# Altium PCB PCB_EN1093.PcbDoc
Units mm, origin at the board's own origin, x right, y up, seen from the top; angles counter-clockwise.
Board outline 71.18 x 60.2 mm, 2 copper layers (Top Layer, Bottom Layer); 26 components, 25 nets, 107 pads, 3 vias.
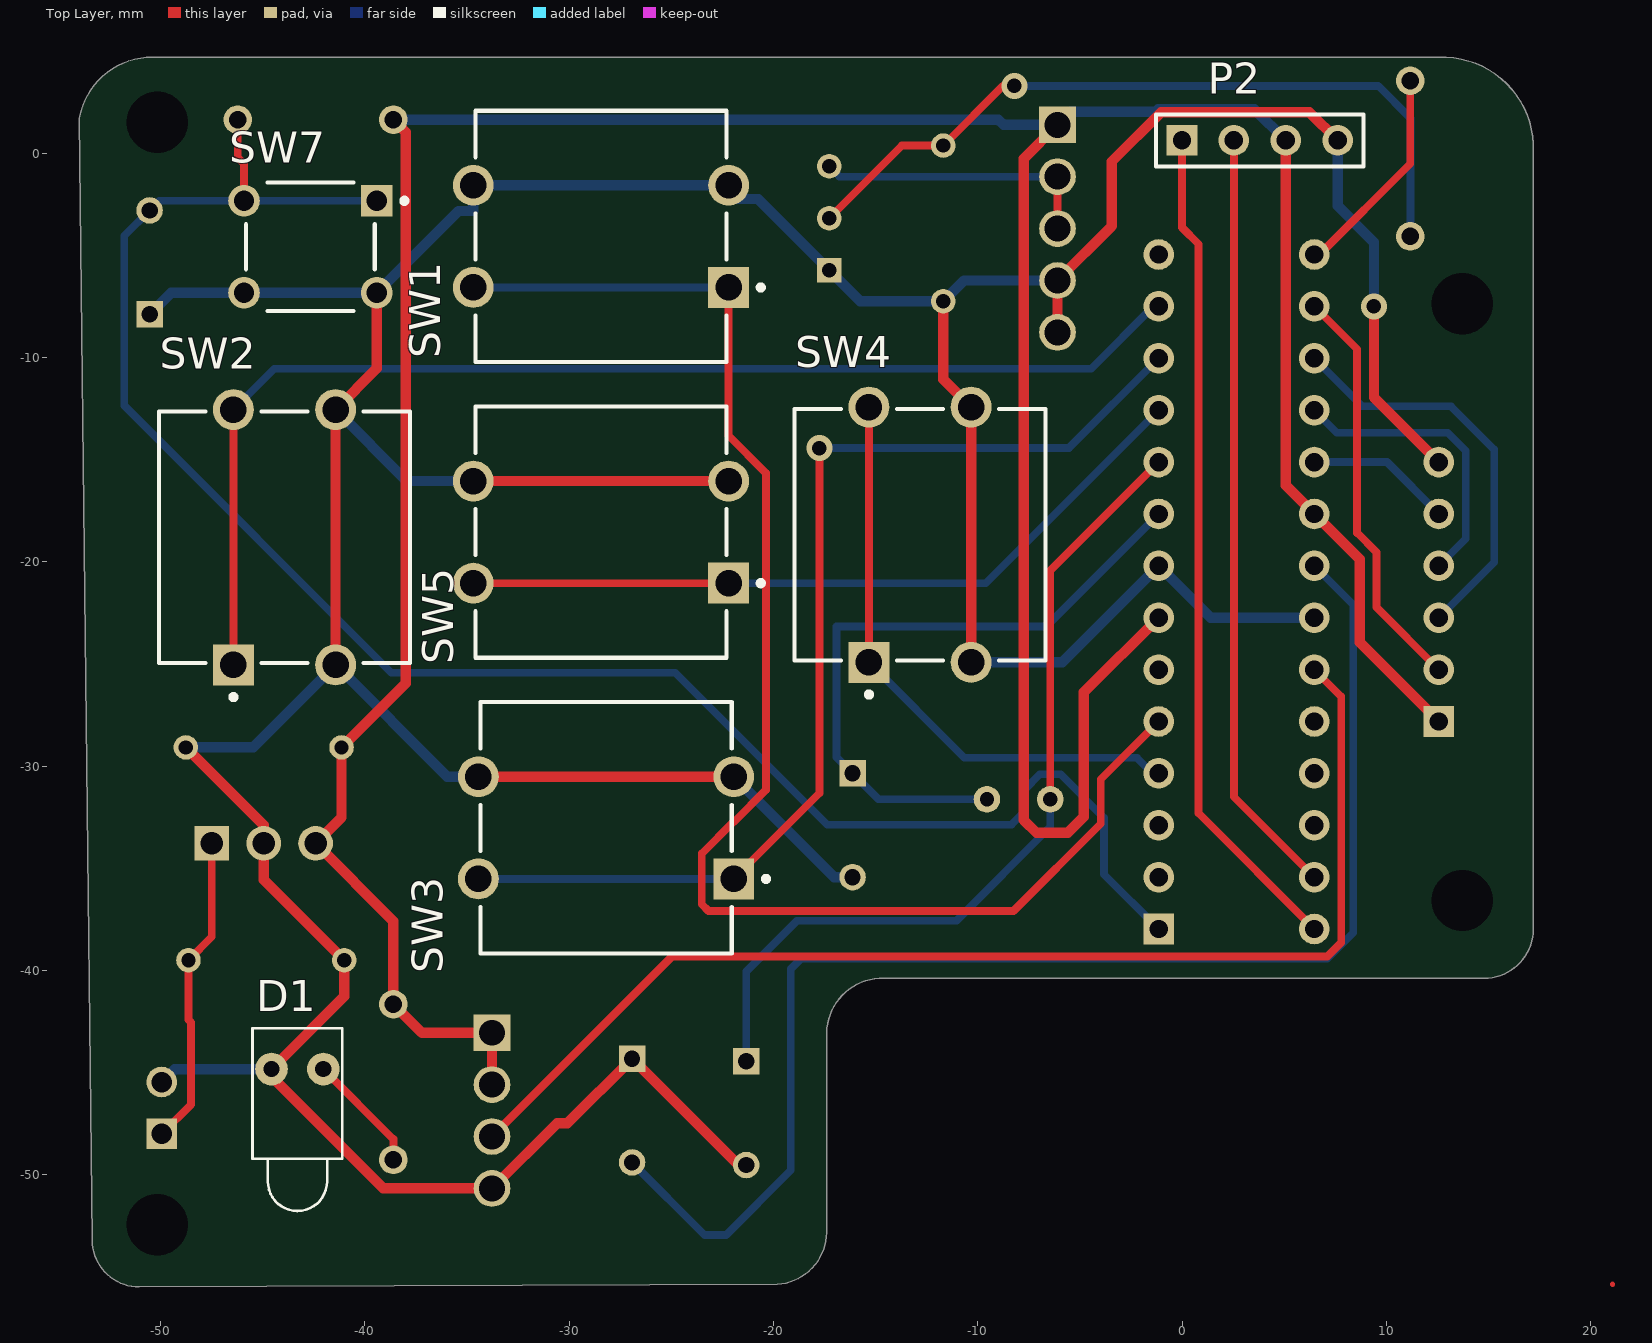
[diagram p0: Top Layer view]
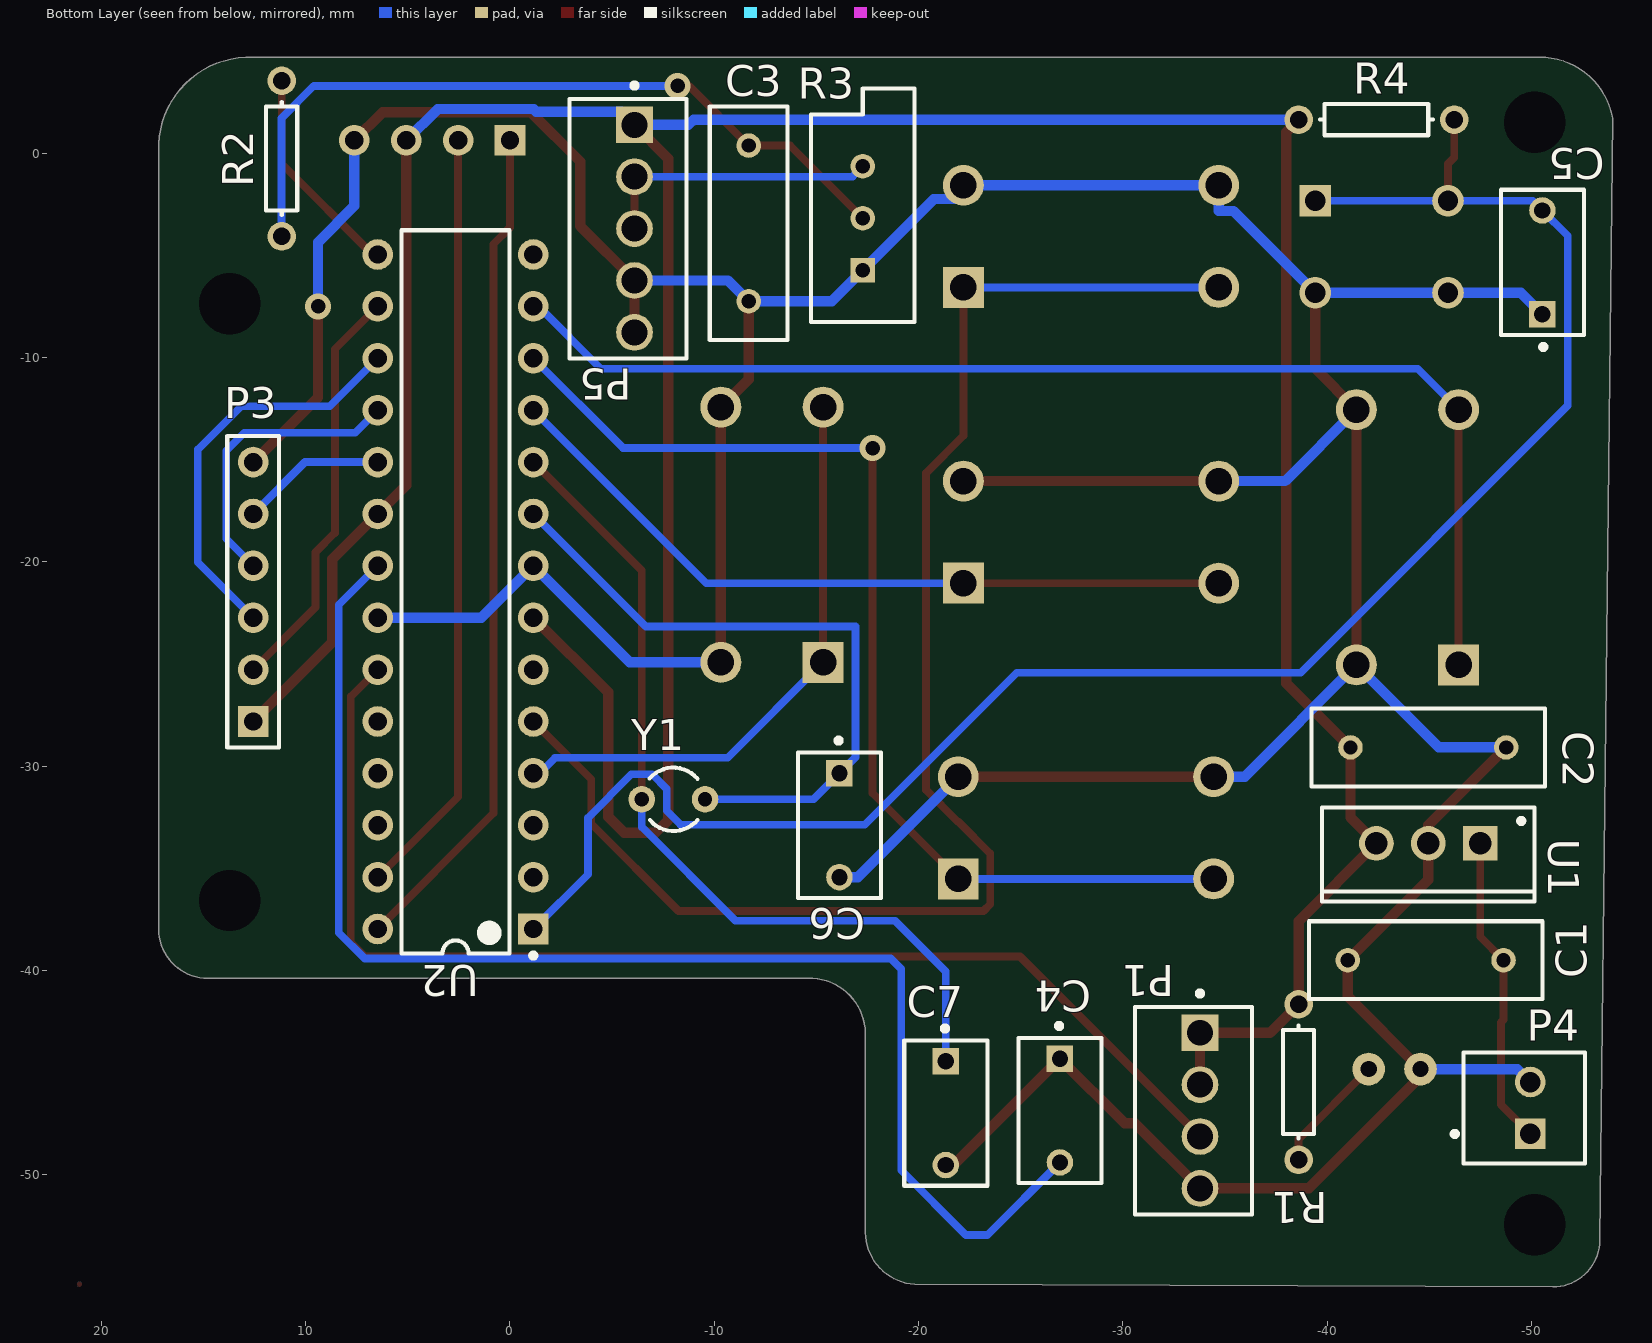
[diagram p1: Bottom Layer view, seen from below]
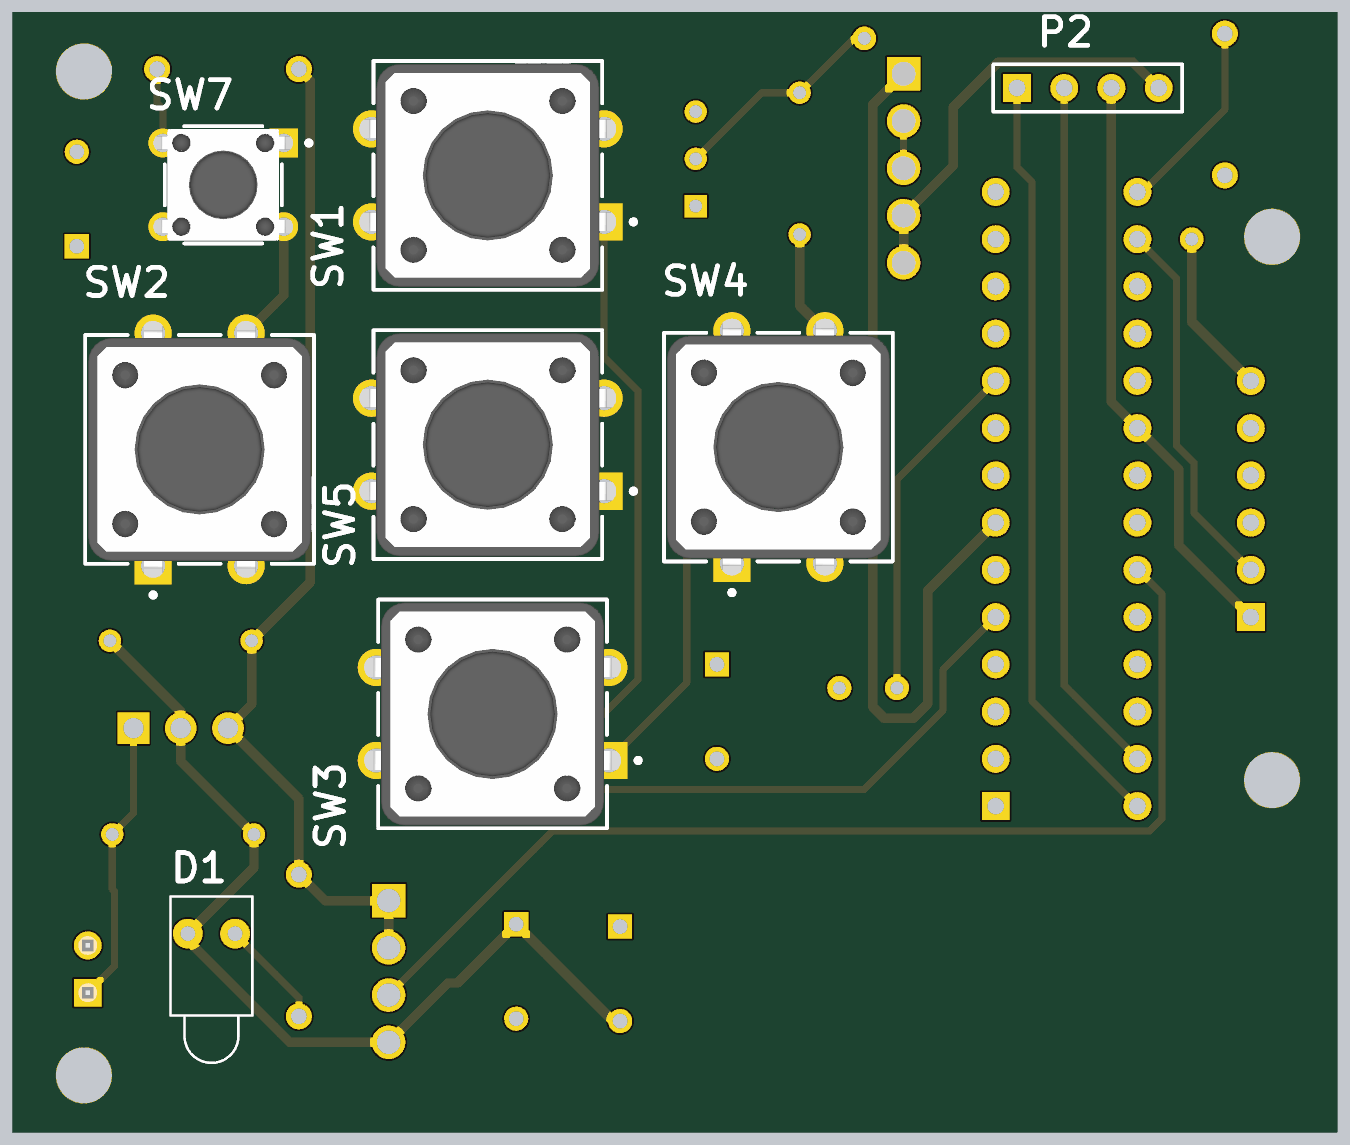
[diagram p2: 3D render of the assembled board from above, using the file's embedded part models]

## Layer stack, top to bottom
Top Solder: solder mask 0.0102, Solder Resist, Dk 3.5
Top Layer: signal copper 0.0356
Dielectric 1: dielectric 0.32, FR-4, Dk 4.8
Bottom Layer: signal copper 0.0356
Bottom Solder: solder mask 0.0102, Solder Resist, Dk 3.5

## Board outline
-53.349,-53.204 -53.983,1.721 cw(c-50.414,1.084) -50.686,4.699 12.573,4.699 cw(c12.766,0.267) 17.198,0.459 17.198,0.332 17.198,-38.1 17.198,-37.973 cw(c14.785,-37.973) 14.785,-40.386 14.732,-40.386 -14.605,-40.386 ccw(c-14.669,-43.116) -17.399,-43.053 -17.399,-52.621 cw(c-19.981,-52.79) -19.812,-55.372 -51.053,-55.5 cw(c-51.053,-53.204)

## Design rules (kind name [scope] priority, off if disabled: settings)
Clearance [All] p1: gap=0.381 ignorepadtopadclearanceinfootprint=TRUE except(0.508: Arc-Hole Track-Hole SMDPad-Hole THPad-Hole Via-Hole Fill-Hole Poly-Hole Region-Hole Text-Hole)
ComponentClearance [All] p1: gap=0.254 collisioncheckmode=3 verticalgap=0.508 showdistances=FALSE
HoleSize [All] p1: absolutevalues=TRUE maxlimit=3 minlimit=0.025 maxpercent=80.000 minpercent=20.000
PolygonConnect [All] p1: connectstyle=Relief reliefconductorwidth=0.254 reliefentries=4 polygonreliefangle="90 Angle" airgapwidth=0.254
RoutingVias [All] p1: holewidth=0.711 width=1.27 viastyle="Through Hole" minholewidth=0.711 minwidth=1.27 maxholewidth=0.711 maxwidth=1.27
SilkToSolderMaskClearance [IsPad] p1 off: minsilkscreentomaskgap=0.254 clearancetoexposedcopper=TRUE
SolderMaskExpansion [All] p1: expansion=0.102 istentingtop=FALSE
Width Width_1 [InNet('+5') or InNet('GND')] p1: maxlimit=0.635 minlimit=0.381 preferedwidth=0.508
Width [All] p2: maxlimit=0.508 minlimit=0.254 preferedwidth=0.381
27 further rules are at their usual default settings.

## Components (designator, comment, footprint, x,y, rotation, side; value= is the part's Value field where it differs from the comment)
C1 "330uF" RAD-0.3 -44.831,-39.497 r180 bottom locked
C2 "0.1uF" RAD-0.3 -44.958,-29.083 r0 bottom locked
C3 "0.02uF" RAD-0.3 -11.684,-3.429 r90 bottom locked
C4 "=value" KEMT-C330C105M5U5TA -26.924,-46.863 r270 bottom locked
C5 "C330C105M5U5TA" KEMT-C330C105M5U5TA -50.546,-5.334 r90 bottom locked
C6 "C330C105M5U5TA" KEMT-C330C105M5U5TA -16.129,-32.893 r270 bottom locked
C7 "C330C105M5U5TA" KEMT-C330C105M5U5TA -21.336,-46.99 r270 bottom locked
D1 "LED1" LED-1 -43.307,-44.831 r270 top locked
P1 "640456-4" TECO-640456-4 -33.782,-46.863 r90 bottom locked
P2 "Header 4" HDR1X4 0,0.635 r0 top
P3 "Header 6" HDR1X6 12.573,-27.813 r90 bottom
P4 "61900211121" 61900211121 -49.657,-46.736 r270 bottom locked
P5 "640456-5" TECO-640456-5 -6.096,-3.683 r90 bottom locked
R1 "330" AXIAL-0.3 -38.608,-45.466 r270 bottom locked
R2 "1K" AXIAL-0.3 11.176,-0.254 r90 bottom
R3 "10K" VR5 -17.272,-3.175 r90 bottom locked
R4 "10K" AXIAL-0.3 -42.418,1.651 r180 bottom locked
SW1 "FSM100" FP-FSM100-MFG -28.448,-4.064 r180 top locked
SW2 "FSM100" FP-FSM100-MFG -43.942,-18.796 r90 top locked
SW3 "FSM100" FP-FSM100-MFG -28.194,-33.02 r180 top locked
SW4 "FSM100" FP-FSM100-MFG -12.827,-18.669 r90 top locked
SW5 "FSM100" FP-FSM100-MFG -28.448,-18.542 r180 top locked
SW7 "EVQ-PAG07K" FP-EVQ-PAG07K-MFG -42.672,-4.572 r270 top locked
U1 "L7805CV" TO220 -44.958,-33.782 r0 bottom locked
U2 "ATmega328P-PU" 28P3 2.667,-21.463 r0 bottom
Y1 "XTAL" R38 -8.001,-31.623 r90 bottom locked

## Footprints (in the part's own frame and the unit in brackets; to place one, negate y for a bottom-side part, rotate by r counter-clockwise, add the part's x,y. Pads: shape width x height; smd on the part's side, far side on the other; paste and mask are expansions set on the pad)
28P3 [mm] "28-Pin Plastic Dual In-Line Package (PDIP)"
  rect 1.5x1.5 hole 0.9: 1(-3.81,16.51)
  round 1.5 hole 0.9: 2(-3.81,13.97) 3(-3.81,11.43) 4(-3.81,8.89) 5(-3.81,6.35) 6(-3.81,3.81) 7(-3.81,1.27) 8(-3.81,-1.27) 9(-3.81,-3.81) 10(-3.81,-6.35) 11(-3.81,-8.89) 12(-3.81,-11.43) 13(-3.81,-13.97) 14(-3.81,-16.51) 15(3.81,-16.51) 16(3.81,-13.97) 17(3.81,-11.43) 18(3.81,-8.89) 19(3.81,-6.35) 20(3.81,-3.81) 21(3.81,-1.27) 22(3.81,1.27) 23(3.81,3.81) 24(3.81,6.35) 25(3.81,8.89) 26(3.81,11.43) 27(3.81,13.97) 28(3.81,16.51)
  silkscreen extent -3.93,-17.7 2.65,17.93, body extent -3.6,-17.65 3.6,17.65, height 4.58
61900211121 [mm] "2.54mm Male Locking Header, 2p"
  rect 1.5x1.5 hole 1: 1(1.27,0.3)
  round 1.5 hole 1: 2(-1.27,0.3)
  silkscreen extent -2.71,-3.52 2.71,2.98, body extent -2.54,-2.9 2.54,2.9, height 11.53
AXIAL-0.3 [mm] "Axial Device, Thru-Hole; 2 Leads; 0.3 in Pin Spacing"
  round 1.4 hole 0.85: 1(-3.81,0) 2(3.81,0)
  silkscreen extent -2.77,-0.76 2.77,0.76
FP-EVQ-PAG07K-MFG [mm]
  rect 1.55x1.55 hole 1 paste-1000 mask+0: A(-2.25,3.25)
  round 1.55 hole 1 paste-1000 mask+0: A'(-2.25,-3.25) B(2.25,3.25) B'(2.25,-3.25)
  silkscreen extent -3.15,-3.15 3.15,4.73, body extent -3.25,-4.13 3.25,4.13, height 0.25
FP-FSM100-MFG [mm]
  rect 2x2 hole 1.3 paste-1000 mask+0: 1(-6.25,2.5)
  round 2 hole 1.3 paste-1000 mask+0: 2(6.25,2.5) 3(-6.25,-2.5) 4(6.25,-2.5)
  silkscreen extent -7.95,-6.15 6.15,6.15, body extent -7.35,-6.25 7.35,6.25, height 0.25
HDR1X4 [mm] "Connector; Header; 4 Position"
  rect 1.5x1.5 hole 0.9: 1(0,0)
  round 1.5 hole 0.9: 2(2.54,0) 3(5.08,0) 4(7.62,0)
  silkscreen extent -1.27,-1.27 8.89,1.27
HDR1X6 [mm] "Connector; Header; 6 Position"
  rect 1.5x1.5 hole 0.9: 1(0,0)
  round 1.5 hole 0.9: 2(2.54,0) 3(5.08,0) 4(7.62,0) 5(10.16,0) 6(12.7,0)
  silkscreen extent -1.27,-1.27 13.97,1.27
KEMT-C330C105M5U5TA [mm] "THD, 2-Leads, Body 7.11x4.07mm"
  rect 1.3x1.3 hole 0.8: 1(-2.54,0)
  round 1.3 hole 0.8: 2(2.54,0)
  silkscreen extent -4.27,-2.03 3.55,2.03, body extent -3.55,-2.03 3.55,2.03, height 9.14
LED-1 [mm] "LED; 2 Leads"
  round 1.6 hole 0.8: 1(0,1.27) 2(0,-1.27)
  silkscreen extent -2,-2.2 6.95,2.2
R38 [mm] "Crystal, Thru-Hole; 2 Leads; Body 3.1 x 8.2 mm (Dia.xH)"
  round 1.3 hole 0.7: 1(0,1.55) 2(0,-1.55)
  silkscreen extent -1.55,-1.19 1.55,1.17
RAD-0.3 [mm] "Radial Cap, Thru-Hole; 2 Leads; 0.3 in Pin Spacing"
  round 1.2 hole 0.7: 1(-3.81,0) 2(3.81,0)
  silkscreen extent -5.71,-1.91 5.71,1.91
TECO-640456-4 [mm] "Through Hole, 4-Leads, Body 10.16x5.72mm, Pitch 2.54mm"
  rect 1.8x1.8 hole 1.27 paste+0: 1(3.81,0)
  round 1.8 hole 1.27 paste+0: 2(1.27,0) 3(-1.27,0) 4(-3.81,0)
  silkscreen extent -5.08,-2.54 5.86,3.18, body extent -5.08,-2.54 5.08,3.18, height 10.03
TECO-640456-5 [mm] "Through Hole, 5-Leads, Body 12.7x5.72mm, Pitch 2.54mm"
  rect 1.8x1.8 hole 1.27 paste+0: 1(5.08,0)
  round 1.8 hole 1.27 paste+0: 2(2.54,0) 3(0,0) 4(-2.54,0) 5(-5.08,0)
  silkscreen extent -6.35,-2.54 7.13,3.18, body extent -6.35,-2.67 6.35,3.17, height 10.29
TO220 [mm] "TO, Thru-Hole, Vertical, Heatsink Mounted; 3 In-Line Leads; Pitch 2.54 mm"
  rect 1.7x1.7 hole 1.1: 1(-2.54,0)
  round 1.7 hole 1.1: 2(0,0) 3(2.54,0)
  silkscreen extent -5.2,-1.75 5.2,2.85, body extent -5.25,-1.8 5.25,2.9, height 19.7
VR5 [mm] "Thru-Hole; 3 Leads"
  rect 1.2x1.2 hole 0.7: 1(-2.54,0)
  round 1.2 hole 0.7: 2(0,0) 3(2.54,0)
  silkscreen extent -5.08,-2.54 6.35,2.54

## Part data
C1 C2 C3: library part Cap, "Capacitor", LatestRevisionDate=17-Jul-2002, LatestRevisionNote="Re-released for DXP Platform.", PackageDescription="Radial Cap, Thru-Hole; 2 Leads; 0.3 in Pin Spacing", PackageReference=RAD-0.3, Published=8-Jun-2000, Publisher="Altium Limited"
C4: library part CMP-2000-06056-1, "Ceramic Capacitor, 1 uF, +/- 20%, 50 V, -10 to 85 degC, 2-Pin THD, RoHS, Bulk", Capacitance=0.1uF, Manufacturer=Kemet, Operating Temperature=10°C~85°C, Package / Case=Radial, Package Description="2-Pin Through Hole Device, Body 7.11 x 4.07 mm", Package Reference=C330C105M5U5TA, Ratings=-, Standard Package=250, Temperature Coefficient=Z5U, Tolerance=±20%, Voltage - Rated=50V, Applications=GeneralPurpose, Catalog Drawings=C330(std), Category=Capacitors, Datasheet URL=http://www.kemet.com/Lists/ProductCatalog/Attachments/599/KEM_C1051_GOLDMAX_Z5U.pdf, Datasheet Version=12/2015, Family=CeramicCapacitors, Features=-, Height - Seated (Max)="0.360\"(9.14mm)", Lead Spacing="0.200\"(5.08mm)", Lead Style=Straight, Manufacturer URL=http://www.kemet.com/, Mounting Technology=ThroughHole, Mounting Type=ThroughHole, Online Catalog=GoldenMax™Series, Other Names=399-4390, Packaging=Bulk, PCN Design/Specification=C3yySeriesGoldenMaxLeadConfiguration02/Feb/2015, Product Training Modules=CapacitorBasics-TypicalUsesforCapacitors, Series=GoldenMax™, Size / Dimension="0.300\"Lx0.150\"W(7.62mmx3.81mm)", Thickness (Max)=-
C5: library part CMP-2000-06056-1, "Ceramic Capacitor, 1 uF, +/- 20%, 50 V, -10 to 85 degC, 2-Pin THD, RoHS, Bulk", Capacitance=0.1uF, Manufacturer=Kemet, Operating Temperature=10°C~85°C, Package / Case=Radial, Package Description="2-Pin Through Hole Device, Body 7.11 x 4.07 mm", Ratings=-, Standard Package=250, Temperature Coefficient=Z5U, Tolerance=±20%, Voltage - Rated=50V, Applications=GeneralPurpose, Catalog Drawings=C330(std), Category=Capacitors, Datasheet URL=http://www.kemet.com/Lists/ProductCatalog/Attachments/599/KEM_C1051_GOLDMAX_Z5U.pdf, Datasheet Version=12/2015, Family=CeramicCapacitors, Features=-, Height - Seated (Max)="0.360\"(9.14mm)", Lead Spacing="0.200\"(5.08mm)", Lead Style=Straight, Manufacturer URL=http://www.kemet.com/, Mounting Technology=ThroughHole, Mounting Type=ThroughHole, Online Catalog=GoldenMax™Series, Other Names=399-4390, Package Reference=C330C105M5U5TA, Packaging=Bulk, PCN Design/Specification=C3yySeriesGoldenMaxLeadConfiguration02/Feb/2015, Product Training Modules=CapacitorBasics-TypicalUsesforCapacitors, Series=GoldenMax™, Size / Dimension="0.300\"Lx0.150\"W(7.62mmx3.81mm)", Thickness (Max)=-
C6 C7: library part CMP-2000-06056-1, "Ceramic Capacitor, 1 uF, +/- 20%, 50 V, -10 to 85 degC, 2-Pin THD, RoHS, Bulk", Capacitance=22pF, Manufacturer=Kemet, Operating Temperature=10°C~85°C, Package / Case=Radial, Package Description="2-Pin Through Hole Device, Body 7.11 x 4.07 mm", Ratings=-, Standard Package=250, Temperature Coefficient=Z5U, Tolerance=±20%, Voltage - Rated=50V, Applications=GeneralPurpose, Catalog Drawings=C330(std), Category=Capacitors, Datasheet URL=http://www.kemet.com/Lists/ProductCatalog/Attachments/599/KEM_C1051_GOLDMAX_Z5U.pdf, Datasheet Version=12/2015, Family=CeramicCapacitors, Features=-, Height - Seated (Max)="0.360\"(9.14mm)", Lead Spacing="0.200\"(5.08mm)", Lead Style=Straight, Manufacturer URL=http://www.kemet.com/, Mounting Technology=ThroughHole, Mounting Type=ThroughHole, Online Catalog=GoldenMax™Series, Other Names=399-4390, Package Reference=C330C105M5U5TA, Packaging=Bulk, PCN Design/Specification=C3yySeriesGoldenMaxLeadConfiguration02/Feb/2015, Product Training Modules=CapacitorBasics-TypicalUsesforCapacitors, Series=GoldenMax™, Size / Dimension="0.300\"Lx0.150\"W(7.62mmx3.81mm)", Thickness (Max)=-
D1: "Typical RED GaAs LED", LatestRevisionDate=08-Jul-2005, LatestRevisionNote="Mech Layer 1 removed.", PackageDescription="LED; 2 Leads", PackageReference=LED-1, Published=8-Jun-2000, Publisher="Altium Limited"
P1: library part CMP-2000-05419-1, "Male Header, Pitch 2.54 mm, 1 x 4 Position, Height 10.03 mm, Tail Length 3.56 mm, RoHS, Bulk", Color=White, Current, Rating="5 /  / A", Flammability Rating=UL94V-0, Manufacturer="TE Connectivity", Temperature, Operating="-55to+105 /  / degC", Voltage, Rating="250 /  / V", Agency Approvals=CSA,UL, Angle=Straight, Brand/Series=MTA-100Series, Color, Housing=White, Connector Type=MTA-100, Contact Centerline Spacing="0.100 /  / in.", Contact Mating Area Plating=Tin, Contact Plating=Tin, Contact Shape=Square, Contact Termination Area Plating=Tin, Datasheet URL=https://datasheet.ciiva.com/16286/eng-ds-82056-mta-0608-16286228.pdf, Datasheet Version=Dec-14, Length, Overall="0.4 /  / \"", Length, Pin="0.14 /  / \"", Length, Terminal Post="0.14 /  / in.", Manufacturer URL=http://www.te.com/, Material, Contact=CopperAlloy, Material, Housing=Polyester, Mount Angle=Vertical, Mounting Hole Size="0.04 /  / \"", Mounting Type=PCMount, Number of Contacts=4, Number of Positions=4, Number of Rows=1, Pin Spacing="0.1 /  / \"", Primary Type=InterconnectSystem, Size, Post="0.025 /  / in.", Special Features=Pinstrip, Standards=RoHSCompliant,ELVCompliant,UL94V-0, Termination=Solder, Type=PCBPlug
P2: "Header, 4-Pin", LatestRevisionDate=17-Jul-2002, LatestRevisionNote="Re-released for DXP Platform.", Publisher="Altium Limited"
P3: "Header, 6-Pin", LatestRevisionDate=17-Jul-2002, LatestRevisionNote="Re-released for DXP Platform.", Publisher="Altium Limited"
P4: library part CMP-1502-00584-1, "Male Locking Header WR-WTB, THT, Vertical, pitch 2.54 mm, 1 x 2 position", Contact Resistance=20mOhm, Manufacturer="Wurth Elektronik", Operating Temperature=-40to105degC, Working Voltage=250VAC, Datasheet URL=https://katalog.we-online.de/em/datasheet/6190xx11121.pdf, Gender=Male, Manufacturer URL=http://www.we-online.de, Mounting Technology=THT, Orientation=Vertical, Package Reference=61900211121, Packaging=Bag, Part Number=61900211121, Pitch=2.54mm, Position=1x2, Publisher=WurthElektronik
P5: library part CMP-1684-00014-1, "Male Header, Pitch 2.54 mm, 1 x 5 Position, Height 10.03 mm, Tail Length 3.56 mm,  / -55 to 105 degC, RoHS, Bulk", Color=White, Current, Rating="5 /  / A", Flammability Rating=UL94V-0, Manufacturer="TE Connectivity", Package Description="Male Header, Pitch 2.54 mm, 1 x 5 Position, Height 10.03 mm, Tail Length 3.56 mm", Package Reference=THD, Temperature, Operating="-55to+105 /  / °C", Voltage, Rating="250 /  / V", Agency Approvals=CSA,UL, Angle=Straight, Brand/Series=MTA-100Series, Color, Housing=White, Connector Type=MTA-100, Contact Centerline Spacing="0.100 /  / in.", Contact Mating Area Plating=Tin, Contact Plating=Tin, Contact Shape=Square, Contact Termination Area Plating=Tin, Datasheet URL=http://sigma.octopart.com/77881742/technical_drawing/TE-Connectivity-640456-5.pdf, Datasheet Version="Rev. W3", Length, Overall="0.5 /  / \"", Length, Pin="0.14 /  / \"", Length, Terminal Post="0.14 /  / in.", Manufacturer URL=http://www.te.com, Material, Contact=CopperAlloy, Material, Housing=Polyester, Mount Angle=Vertical, Mounting Hole Size="0.04 /  / \"", Mounting Type=PCMount, Number of Contacts=5, Number of Positions=5, Number of Rows=1, Pin Spacing="0.1 /  / \"", Primary Type=InterconnectSystem, Size, Post="0.025 /  / in.", Special Features=Pinstrip, Standards=RoHSCompliant,ELVCompliant,UL94V-0, Termination=Solder, Type=PCBPlug
R1 R2 R4: library part Res1, "Resistor", LatestRevisionDate=17-Jul-2002, LatestRevisionNote="Re-released for DXP Platform.", PackageDescription="Axial Device, Thru-Hole; 2 Leads; 0.3 in Pin Spacing", PackageReference=AXIAL-0.3, Published=8-Jun-2000, Publisher="Altium Limited"
R3: library part RPot, "Potentiometer", LatestRevisionDate=17-Jul-2002, LatestRevisionNote="Re-released for DXP Platform.", PackageDescription="Variable Resistor, Thru-Hole; 3 Leads", PackageReference=VR5, Published=8-Jun-2000, Publisher="Altium Limited", Set Position=0.5, Sim Note="Enter the Resistance value and the set point into parameter fields."
SW1 SW2 SW3 SW4 SW5: library part CMP-03402-000014-1, "SWITCH TACTILE SPST-NO 0.05A 24V", Actuator Color=Black, Contact Current Rating=50mA, Contact Resistance=100mR, Max Operating Temperature=85°C, Max Voltage Rating (DC)=12V, Min Operating Temperature=-35°C, Operating Force=1.57N, Package Quantity=400, Voltage Rating (DC)=24V, Actuator Length=6.35mm, Actuator Material=Polyester, Actuator Type=Standard, Contact Material="Copper Alloy", Contact Plating=Silver, Contact Type="1 maker", Current Rating=50mA, Depth=12.5mm, Electrical Life=100000Cycles, ELV=Compliant, Illumination Type=Non-Illuminated, Lead Free="Lead Free", Length=12mm, Max Current Rating=50mA, Mechanical Life=100000Cycles, Mount="Through Hole", Orientation=Straight, Packaging="Loose Piece", RoHS Compliant=Yes, Series="FSM100 ~ 104", Switch Function=Off-Mom, Switch Travel=0.3mm, Termination="PC Pins", Throw Configuration=SPST, Type=Switch
SW7: library part CMP-05618-000034-1, "SWITCH TACTILE SPST-NO 0.02A 15V", Actuator Color=Black, Contact Current Rating=20mA, Contact Resistance=50mR, Max Operating Temperature=70°C, Max Voltage Rating (DC)=15V, Min Operating Temperature=-20°C, Operating Force=2.6N, Package Quantity=500, Actuator Length=3.1mm, Actuator Type=Standard, Current Rating=20mA, Depth=7.8mm, Electrical Life=50000Cycles, Illumination Type=Non-Illuminated, Lead Free="Lead Free", Length=6mm, Max Current Rating=20mA, Mechanical Life=50000Cycles, Mount="Through Hole", Orientation=Straight, Packaging=Bulk, Radiation Hardening=No, RoHS Compliant=Yes, Series=EVQPA, Size=6mm, Switch Function=Off-Mom, Switch Travel=0.25mm, Termination="PC Pin", Throw Configuration=SPST, Voltage Rating (DC)=15V
U1: library part CMP-0244-00483-1, "Positive Voltage Regulator, 5V, 3-Pin TO-220", ComponentLink1Description="Manufacturer URL", ComponentLink1URL=http://www.st.com, ComponentLink2Description=Datasheet, ComponentLink2URL=http://www.st.com/internet/com/TECHNICAL_RESOURCES/TECHNICAL_LITERATURE/DATASHEET/CD00000444.pdf, ComponentLink3Description="Package Specification", ComponentLink3URL=http://www.st.com/internet/com/TECHNICAL_RESOURCES/TECHNICAL_LITERATURE/PACKAGE_INFORMATION/CD00004649.pdf, DatasheetVersion=16/11/2011, PackageDescription="TO, Thru-Hole, Vertical, Heatsink Mounted; 3 In-Line Leads; Pitch 2.54 mm", PackageReference=TO220, PackageVersion=ver3.0
U2: library part CMP-0095-00013-2, "8-bit AVR Microcontroller, 32KB Flash, 1KB EEPROM, 2KB SRAM, 28-pin PDIP, Industrial Grade (-40°C to 85°C)", ComponentLink1Description="Manufacturer URL", ComponentLink1URL=http://www.atmel.com/, ComponentLink2Description="ATmega48A/48PA/88A/88PA/168A/168PA/328/328P Datasheet", ComponentLink2URL=http://www.atmel.com/dyn/resources/prod_documents/8271.pdf, ComponentLink3Description="ATmega48A/48PA/88A/88PA/168A/168PA/328/328P Summary", ComponentLink3URL=http://www.atmel.com/dyn/resources/prod_documents/8271S.pdf, DatasheetVersion="revD, May-2011", PackageDescription="28-lead (0.300\"/7.62mm Wide) Plastic Dual Inline Package (PDIP)", PackageReference=28P3, PackageVersion="revB, Sep-2001", RevisionNote="DatasheetVersion updated. URLs added."
Y1: "Crystal Oscillator", LatestRevisionDate=17-Jul-2002, LatestRevisionNote="Re-released for DXP Platform.", PackageDescription="Crystal, Thru-Hole; 2 Leads; Body 3.1 x 8.2 mm (Dia.xH)", PackageReference=R38, Published=8-Jun-2000, Publisher="Altium Limited"

## Free pads (board coordinates)
  oval 1.55x0.6 hole 3: 65(-50.165,1.524) 66(-50.165,-52.451) 66(13.716,-36.576) 66(13.716,-7.366)

## Via types
v1: diameter 1.27, hole 0.711, Top Layer to Bottom Layer, 3 vias

## Nets (pads, with @x,y where several pads share a name; then routed paths per layer and width w, separated by ;. In a path a pad name is that pad's centre, name@x,y a point inside that pad or via, vN(x,y) a via of type N, cw(c..) or ccw(c..) an arc to the next point about the centre after c; other vN are vias at no path point)
+5: C2.2 P1.1 P1.2 P2.3 P3.1 P5.1 R1.1 R4.1 U1.3 U2.7 U2.20 | length 180.7
  Top Layer w0.508: R4.1 -37.998,1.041 -37.998,-25.933 C2.2 -41.148,-32.512 U1.3 -38.608,-37.592 R1.1 -37.211,-43.053 P1.1 P1.2 ; P5.1 -7.747,-0.254 -7.747,-32.639 -7.124,-33.262 -5.588,-33.262 -4.802,-32.475 -4.802,-26.392 U2.7 ; P2.3 5.08,-16.256 U2.20 8.7,-19.875 8.7,-23.939 P3.1
  Bottom Layer w0.508: R4.1 -8.992,1.651 -8.738,1.397 P5.1 -5.45,2.043 -1.29,2.043 -1.163,2.17 3.545,2.17 P2.3
DLT: SW2.1 SW2.2 U2.13 | length 59.9
  Top Layer w0.381: SW2.1 SW2.2
  Bottom Layer w0.381: SW2.2 -44.437,-10.541 -4.445,-10.541 -1.397,-7.493 U2.13
GND: C1.1 C2.1 C3.1 C4.1 C5.1 C6.2 C7.2 D1.2 P1.4 P2.4 P3.6 P4.2 P5.4 P5.5 R3.1 SW1.3 SW1.4 SW2.3 SW2.4 SW3.3 SW3.4 SW4.3 SW4.4 SW5.3 SW5.4 SW7.B SW7.B' U1.2 U2.8 U2.22 | length 264
  Top Layer w0.508: C2.1 -44.958,-32.893 U1.2 -44.958,-35.56 C1.1 -41.021,-41.275 D1.2 -44.368,-45.04 -44.368,-45.404 -39.099,-50.673 P1.4 -30.594,-47.485 -30.086,-47.485 C4.1 -21.869,-49.378 -21.488,-49.378 C7.2 ; SW2.3 SW2.4 -39.422,-10.526 SW7.B ; SW5.4 SW5.3 ; SW3.4 SW3.3 ; C3.1 -11.684,-11.062 SW4.4 SW4.3 ; P5.5 P5.4 -3.431,-3.558 -3.431,-0.398 -1.013,2.02 6.235,2.02 P2.4 ; v1(9.398,-7.493) 9.398,-11.938 P3.6
  Bottom Layer w0.508: C5.1 -49.494,-6.822 SW7.B' SW7.B -35.419,-2.819 -34.698,-2.819 SW1.4 SW1.3 -22.198,-2.235 -20.752,-2.235 R3.1 -15.748,-7.239 C3.1 -10.668,-6.223 P5.4 ; P4.2 -49.322,-44.831 D1.2 ; C2.1 -45.479,-29.083 SW2.3 -35.968,-30.52 SW3.4 ; SW2.4 -37.946,-16.042 SW5.4 ; SW3.3 -17.031,-35.433 C6.2 ; SW4.3 -5.869,-24.919 U2.8 1.397,-22.733 U2.22 ; P2.4 7.62,-2.571 9.398,-4.349 v1(9.398,-7.493)
MIC: P1.3 U2.23 | length 59.4
  Top Layer w0.381: P1.3 -24.968,-39.319 7.112,-39.319 7.799,-38.633 7.799,-26.595 U2.23
MISO: P3.4 U2.18 | length 14.4
  Bottom Layer w0.381: U2.18 7.58,-13.676 13.005,-13.676 13.895,-14.566 13.895,-18.871 P3.4
MOSI: P3.3 U2.17 | length 20
  Bottom Layer w0.381: U2.17 8.82,-12.376 13.163,-12.376 15.292,-14.504 15.292,-20.014 P3.3
NetC3_2: C3.2 R2.1 R3.2 | length 37.5
  Top Layer w0.381: R3.2 -13.716,0.381 C3.2 -8.763,3.302 v1(-8.204,3.302)
  Bottom Layer w0.381: v1@-8.172,3.302 9.601,3.302 11.185,1.719 11.185,-4.055 R2.1
NetC4_2: C4.2 U2.21 | length 67.4
  Bottom Layer w0.381: C4.2 -23.368,-52.959 -22.327,-52.959 -19.152,-49.784 -19.152,-39.929 -18.644,-39.421 7.112,-39.421 8.382,-38.151 8.382,-22.098 U2.21
NetC5_2: C5.2 R4.2 SW7.A SW7.A' U2.1 | length 91
  Top Layer w0.381: R4.2 -46.228,-0.202 -45.922,-0.508 SW7.A'
  Bottom Layer w0.381: SW7.A SW7.A' -50.074,-2.322 C5.2 -51.791,-4.039 -51.791,-12.344 -38.71,-25.425 -24.816,-25.425 -17.374,-32.868 -8.354,-32.868 -7.672,-32.186 -7.672,-31.117 -6.957,-30.402 -5.945,-30.402 -3.824,-32.523 -3.824,-35.292 U2.1
NetC6_1: C6.1 U2.9 Y1.2 | length 32.7
  Bottom Layer w0.381: Y1.2 -14.859,-31.623 C6.1 -16.916,-29.566 -16.916,-23.165 -6.655,-23.165 U2.9
NetC7_1: C7.1 U2.10 Y1.1 | length 42.3
  Top Layer w0.381: Y1.1 -6.451,-20.421 U2.10
  Bottom Layer w0.381: C7.1 -21.336,-40.056 -18.847,-37.567 -11.044,-37.567 -6.451,-32.974 Y1.1
NetD1_1: D1.1 R1.2 | length 5.9
  Top Layer w0.381: D1.1 -38.608,-48.26 R1.2
NetP5_2: P5.2 P5.3 R3.3 | length 13.9
  Top Layer w0.381: P5.3 P5.2
  Bottom Layer w0.381: R3.3 -16.764,-1.143 P5.2
NXT: SW3.1 SW3.2 U2.12 | length 53.8
  Top Layer w0.381: SW3.1 -17.755,-31.331 v1(-17.755,-14.427)
  Bottom Layer w0.381: SW3.2 SW3.1 ; v1(-17.755,-14.427) -5.537,-14.427 U2.12
PLY: SW5.1 SW5.2 U2.11 | length 37.1
  Top Layer w0.381: SW5.2 SW5.1
  Bottom Layer w0.381: SW5.1 -9.612,-21.042 U2.11
PRVS: SW1.1 SW1.2 U2.5 | length 72.4
  Top Layer w0.381: SW1.1 -22.198,-13.82 -20.373,-15.645 -20.373,-31.171 -21.929,-32.727 -21.959,-32.727 -23.516,-34.283 -23.516,-36.757 -23.181,-37.092 -8.25,-37.092 -3.976,-32.817 -3.976,-30.646 U2.5
  Bottom Layer w0.381: SW1.2 SW1.1
RCRD: SW4.1 SW4.2 U2.4 | length 28.9
  Top Layer w0.381: SW4.1 SW4.2
  Bottom Layer w0.381: SW4.1 -10.655,-29.591 -2.208,-29.591 -1.446,-30.353 U2.4
RX: U2.3
SCK: P3.5 U2.19 | length 7.1
  Bottom Layer w0.381: U2.19 10.033,-15.113 P3.5
SCL: P2.1 U2.28 | length 41.3
  Top Layer w0.381: P2.1 0,-3.632 0.813,-4.445 0.813,-32.309 U2.28
SDA: P2.2 U2.27 | length 37.7
  Top Layer w0.381: P2.2 2.54,-31.496 U2.27
SPKR: R2.2 U2.15 | length 10.6
  Top Layer w0.381: U2.15 6.731,-4.953 11.176,-0.508 R2.2
SS: P3.2 U2.16 | length 20.3
  Top Layer w0.381: U2.16 8.572,-9.588 8.572,-18.581 9.525,-19.534 9.525,-22.225 P3.2
TX: U2.2
VCC: C1.2 P4.1 U1.1 | length 15.3
  Top Layer w0.381: P4.1 -48.514,-46.563 -48.514,-42.545 -48.641,-42.418 C1.2 -47.498,-38.354 U1.1
pads on no net: U2.6 U2.14 U2.24 U2.25 U2.26
copper on no net: | length 0
  Top Layer w0.254: 21.072,-55.372 21.082,-55.362

## Silkscreen, mask and mechanical layers (free items; w line width, h text height)
Bottom Assembly:
  lines w0.254: -45.847,4.699 -50.686,4.699 ccw(c-50.414,1.084) -53.983,1.721 -53.349,-53.204 ccw(c-51.053,-53.204) -51.053,-55.5 -19.812,-55.372 ccw(c-19.981,-52.79) -17.399,-52.621 -17.399,-43.053 cw(c-14.669,-43.117) -14.605,-40.386 14.732,-40.386 ; -45.72,4.699 12.573,4.699 cw(c12.766,0.267) 17.198,0.459 ; 14.785,-40.386 ccw(c14.785,-37.973) 17.198,-37.973 ; 17.198,-38.1 17.198,0.332